# Altium PCB PCB.PcbDoc
Units mil, origin at the board's own origin, x right, y up, seen from the top; angles counter-clockwise.
Board outline 6000 x 4000 mil, 2 copper layers (Top Layer, Bottom Layer); 44 components, 79 nets, 189 pads, 16 vias.
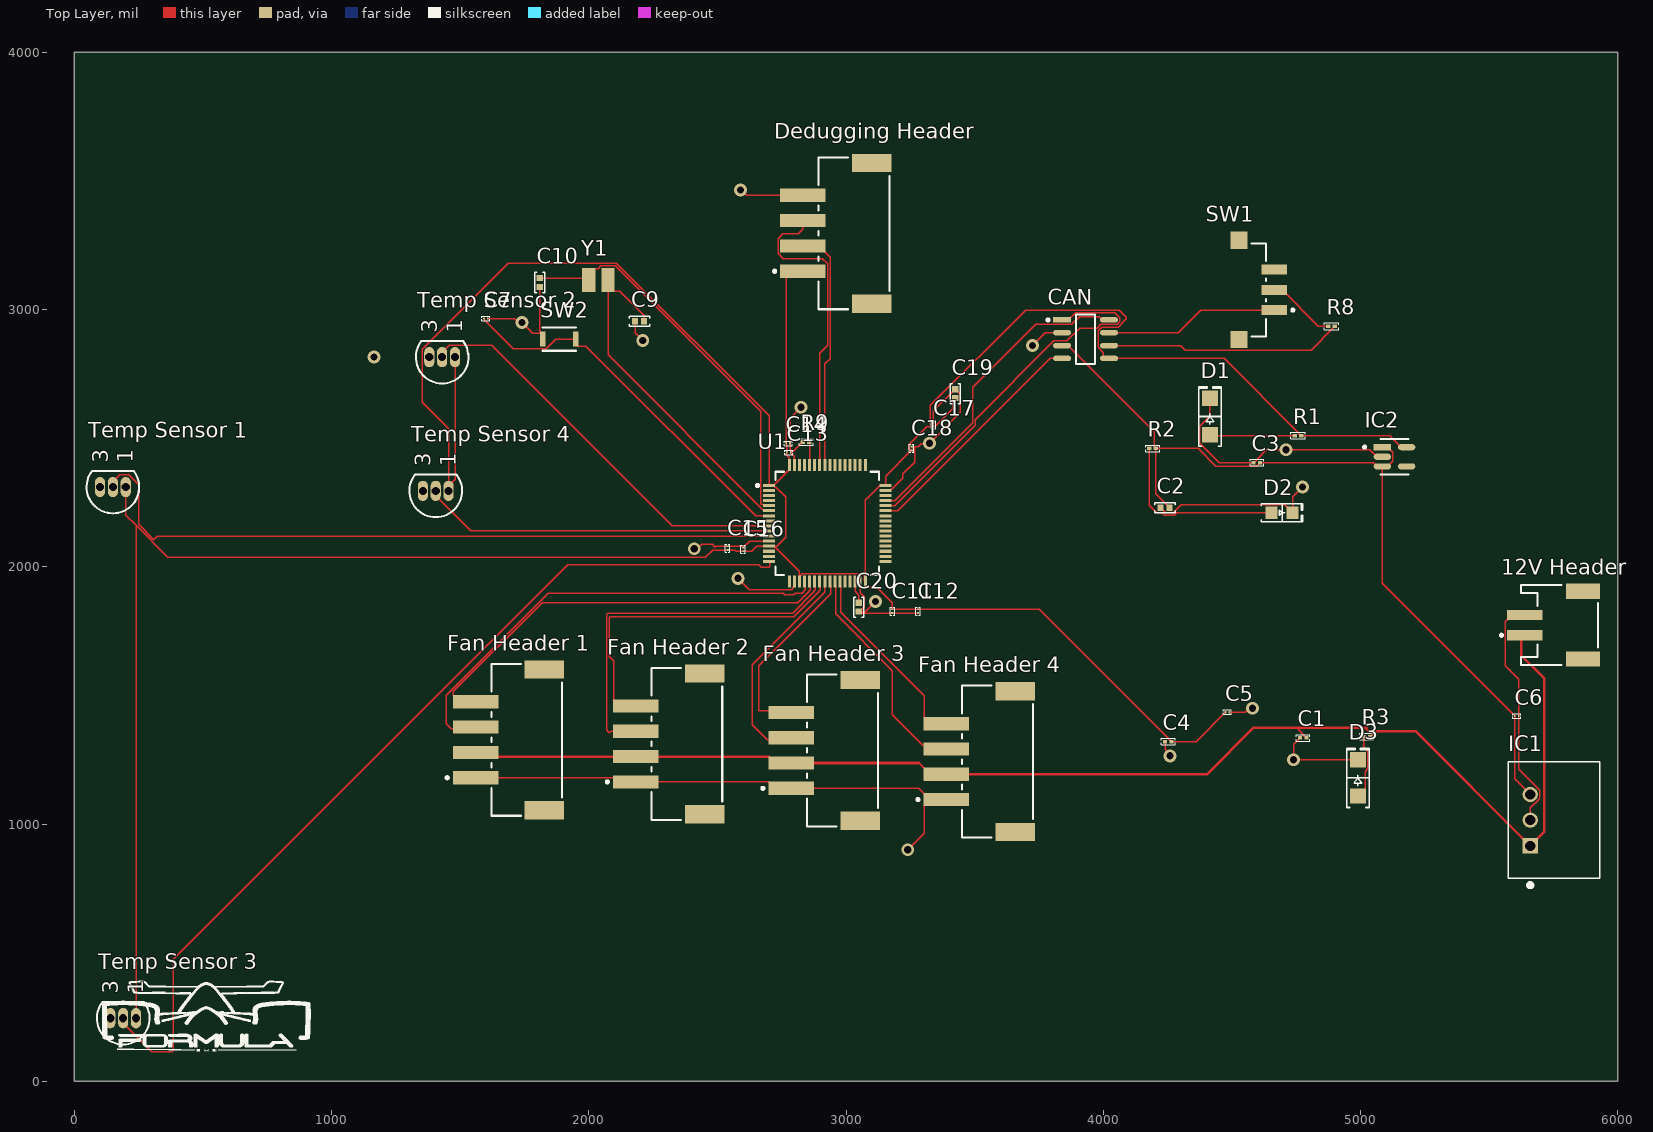
[diagram p0: Top Layer view]
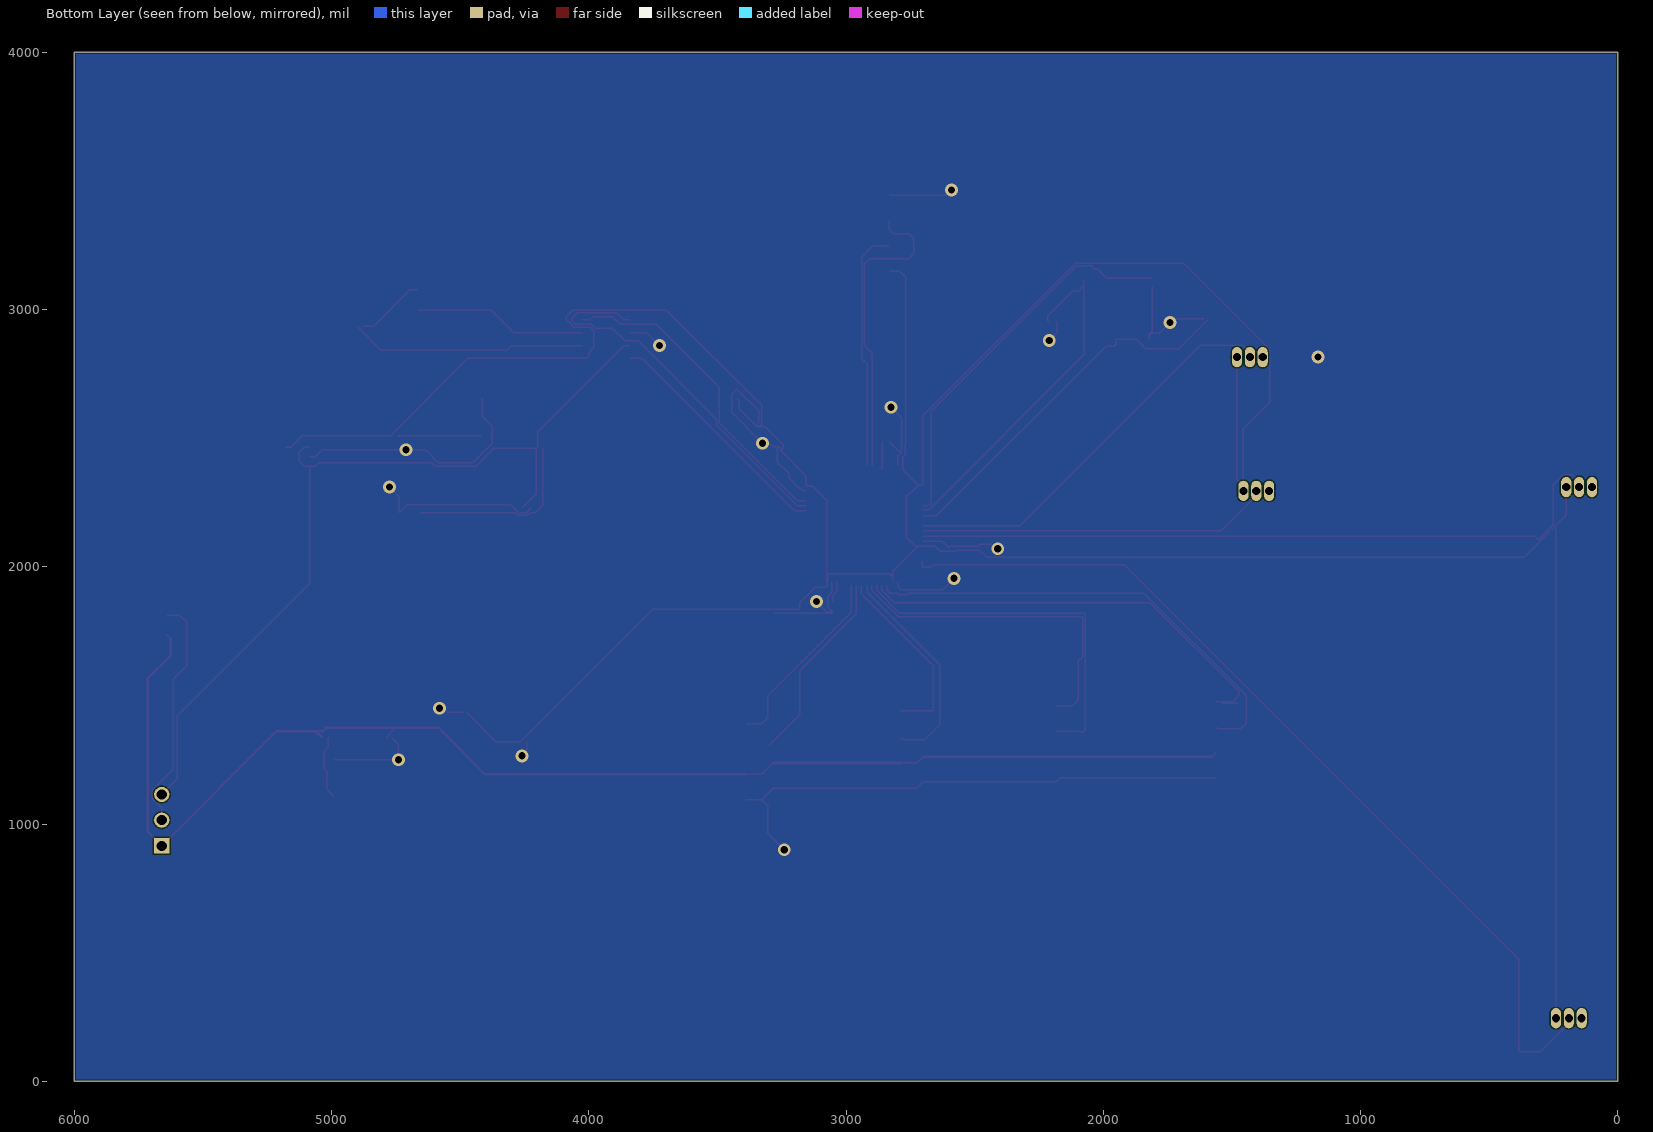
[diagram p1: Bottom Layer view, seen from below]
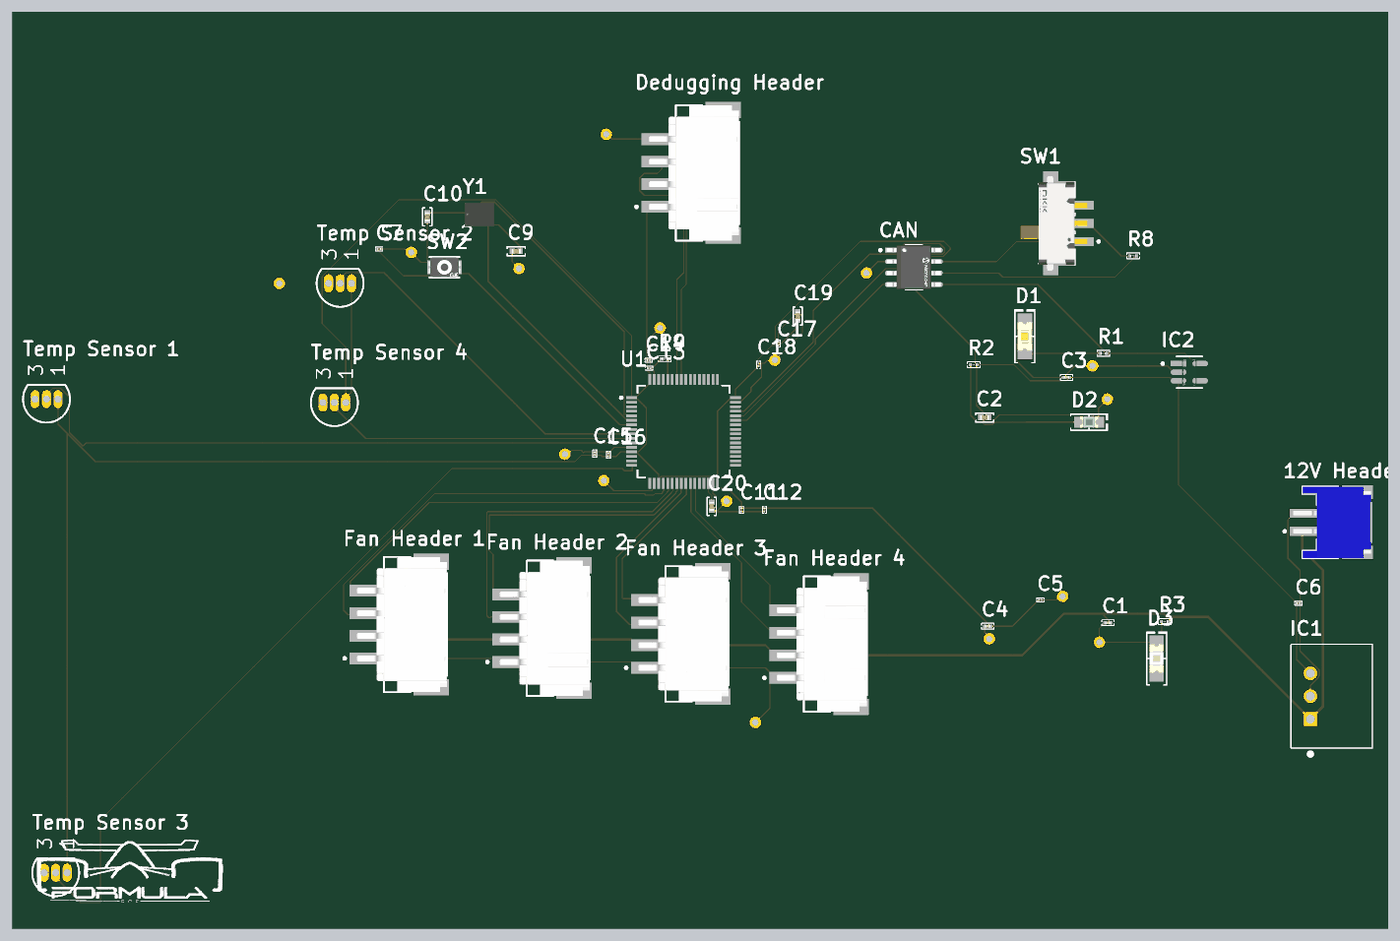
[diagram p2: 3D render of the assembled board from above, using the file's embedded part models]

## Layer stack, top to bottom
Top Solder: solder mask 0.4, Solder Resist, Dk 3.5
Top Layer: signal copper 1.4
Dielectric 1: dielectric 12.6, FR-4, Dk 4.8
Bottom Layer: signal copper 1.4
Bottom Solder: solder mask 0.4, Solder Resist, Dk 3.5

## Board outline
0,0 6000,0 6000,4000 0,4000

## Design rules (kind name [scope] priority, off if disabled: settings)
BoardOutlineClearance [All] p1: gap=7.87 ignorepadtopadclearanceinfootprint=FALSE
Clearance [All] p1: gap=5 ignorepadtopadclearanceinfootprint=FALSE except(9.84: Arc-Hole Track-Hole SMDPad-Hole THPad-Hole Via-Hole Fill-Hole Poly-Hole Region-Hole Text-Hole)
ComponentClearance [All] p1: gap=5 collisioncheckmode=3 verticalgap=5 showdistances=TRUE
DiffPairsRouting [All] p1: maxlimit=10 minlimit=5 mostfreqgap=5 toplayer_minwidth=5 toplayer_maxwidth=1000 toplayer_prefwidth=5 bottomlayer_minwidth=5 bottomlayer_maxwidth=1000 bottomlayer_prefwidth=5 maxuncoupledlength=500
Height [All] p1: minheight=0 maxheight=71497.94 prefheight=500
HoleSize [All] p1: absolutevalues=TRUE maxlimit=248.03 minlimit=11.81 maxpercent=80.000 minpercent=20.000
HoleToHoleClearance [All] p1: gap=9.84 allowstackedmicrovias=FALSE
MinimumAnnularRing [All] p1: minimumring=3
MinimumSolderMaskSliver [All] p1: minsoldermaskwidth=0
PlaneClearance [All] p1: clearance=5
PlaneConnect PlaneConnectPowerPads [InPadClass('PowerPads')] p1: planeconnectstyle=Direct reliefexpansion=20 reliefentries=4 reliefconductorwidth=10 reliefairgap=10
PlaneConnect [All] p2: pad.planeconnectstyle=Relief pad.reliefexpansion=11.81 pad.reliefentries=4 pad.reliefconductorwidth=5 pad.reliefairgap=5 via.planeconnectstyle=Direct via.reliefexpansion=11.81 via.reliefentries=4 via.reliefconductorwidth=5 via.reliefairgap=5
PolygonConnect PolygonConnectPowerPads [All vs (InPadClass('PowerPads'))] p1: connectstyle=Direct reliefconductorwidth=10 reliefentries=4 polygonreliefangle="90 Angle" airgapwidth=10
PolygonConnect [All] p2: thpad.connectstyle=Relief thpad.reliefconductorwidth=5 thpad.reliefentries=4 thpad.polygonreliefangle="90 Angle" thpad.airgapwidth=5 smdpad.connectstyle=Relief smdpad.reliefconductorwidth=5 smdpad.reliefentries=4 smdpad.polygonreliefangle="90 Angle" smdpad.airgapwidth=5 via.connectstyle=Direct via.reliefconductorwidth=5 via.reliefentries=4 via.polygonreliefangle="90 Angle" via.airgapwidth=5
RoutingVias [All] p1: holewidth=11.81 width=23.62 viastyle="Through Hole" minholewidth=11.81 minwidth=23.62 maxholewidth=23.62 maxwidth=259.84
SilkToSilkClearance [All] p1: silktosilkclearance=0
SilkToSolderMaskClearance [IsPad] p1: minsilkscreentomaskgap=5 clearancetoexposedcopper=TRUE
SolderMaskExpansion [All] p1: expansion=2.95 istentingtop=FALSE
Width [All] p1: maxlimit=1000 minlimit=5 preferedwidth=5 minimp=50.000000 maximp=50.000000 favimp=50.000000
20 further rules are at their usual default settings.

## Classes and differential pairs
component class STM: C7 C9 C10 C11 C12 C13 C14 C15 C16 C17 C18 C19 C20 R9 SW2 U1 Y1
component class Sensors: "Temp Sensor 1" "Temp Sensor 2" "Temp Sensor 3" "Temp Sensor 4"
component class Power: C1 C2 C3 C4 D1 D2 D3 IC1 IC2 R1 R2 R3
component class Headers: "12V Header" "Dedugging Header" "Fan Header 1" "Fan Header 2" "Fan Header 3" "Fan Header 4"
component class CANsetup: C5 C6 CAN R8 SW1

## Components (designator, comment, footprint, x,y, rotation, side; value= is the part's Value field where it differs from the comment)
"12V Header" "S2B-PH-SM4-TB(LF)(SN)" "JST- S2B-PH-SM4-TB(LF)(SN)-2_V" 5774.45,1773.11 r90 top
C1 "0.1 µF" "CAP 0201_0603" 4777.2,1335 r0 top
C2 "10 µF" "CAP 0402_1005" 4240,2230 r0 top
C3 "1 µF" "CAP 0201_0603" 4597.2,2405 r0 top
C4 "1 µF" "CAP 0201_0603" 4252.8,1320 r0 top
C5 "0.1 µF" "CAP 01005_0402" 4482.48,1435 r0 top
C6 "0.1 µF" "CAP 01005_0402" 5607.52,1420 r0 top
C7 "0.1 µF" "CAP 01005_0402" 1600,2965 r0 top
C9 "8 pF" "CAP 0402_1005" 2197.68,2955 r0 top
C10 "8 pF" "CAP 0402_1005" 1810,3105 r90 top
C11 "0.1 µF" "CAP 01005_0402" 3180,1827.52 r270 top
C12 "0.1 µF" "CAP 01005_0402" 3280,1827.48 r270 top
C13 "0.1 µF" "CAP 01005_0402" 2777.48,2445 r0 top
C14 "0.1 µF" "CAP 01005_0402" 2775,2480 r0 top
C15 "0.1 µF" "CAP 01005_0402" 2540,2072.52 r90 top
C16 "0.1 µF" "CAP 01005_0402" 2600,2067.52 r90 top
C17 "0.1 µF" "CAP 01005_0402" 3340,2552.48 r90 top
C18 "0.1 µF" "CAP 01005_0402" 3255,2460 r90 top
C19 "4.7 µF" "CAP 0402_1005" 3425,2672.68 r270 top
C20 "2.2 µF" "CAP 0402_1005" 3050,1842.68 r90 top
CAN "MCP2542FDT-E/SN" FP-C04-057-SN-IPC_C 3931.24,2885 r0 top
D1 "Yellow" "LED 1206_3216 YELLOW" 4415,2584.13 r90 top
D2 "Green" "LED 0805_2012 GREEN" 4695,2210 r0 top
D3 "Red" "LED 1206_3216 RED" 4990,1179.13 r90 top
"Dedugging Header" "S4B-XH-SM4-TB(LF)(SN)" FP-S4B-XH-SM4-TB_LF_SN-MFG 3031.1,3296.38 r90 top
"Fan Header 1" "S4B-XH-SM4-TB(LF)(SN)" FP-S4B-XH-SM4-TB_LF_SN-MFG 1758.82,1327.36 r90 top
"Fan Header 2" "S4B-XH-SM4-TB(LF)(SN)" FP-S4B-XH-SM4-TB_LF_SN-MFG 2381.1,1311.38 r90 top
"Fan Header 3" "S4B-XH-SM4-TB(LF)(SN)" FP-S4B-XH-SM4-TB_LF_SN-MFG 2986.1,1286.38 r90 top
"Fan Header 4" "S4B-XH-SM4-TB(LF)(SN)" FP-S4B-XH-SM4-TB_LF_SN-MFG 3588.82,1242.36 r90 top
IC1 "V7805-2000" CONV_V7805-2000 5752.52,1015 r90 top
IC2 "AP2112K-3.3TRG1" FP-SOT25-IPC_A 5132.27,2427.6 r0 top
R1 "220 mOhms" "RES 0201_0603" 4757.2,2510 r0 top
R2 "340 Ohms" "RES 0201_0603" 4192.2,2460 r0 top
R3 "1.8 kOhms" "RES 0201_0603" 5025,1340 r0 top
R8 "120 Ohms" "RES 0201_0603" 4887.2,2935 r0 top
R9 "10 kOhms" "RES 0201_0603" 2845,2485 r0 top
SW1 "SS312SAH4-R" FP-SS312SAH4-R-MFG 4553.78,3076.26 r0 top
SW2 "KXT331LHS" FP-KXT331LHS-MFG 1885,2885 r0 top
"Temp Sensor 1" "TMP36GT9Z" ADI-T-3 150,2310 r90 top
"Temp Sensor 2" "TMP36GT9Z" ADI-T-3 1430,2815 r90 top
"Temp Sensor 3" "TMP36GT9Z" ADI-T-3 190,245 r90 top
"Temp Sensor 4" "TMP36GT9Z" ADI-T-3 1405,2295 r90 top
U1 "STM32F446RET6" FP-LQFP64-5W-MFG 2927.36,2168.62 r0 top
Y1 "NX3225GD-8MHZ-STD-CRA-3" XTAL_NX3225GD-8MHZ-STD-CRA-3_NDK 2037.5,3115 r0 top

## Footprints (in the part's own frame and the unit in brackets; to place one, negate y for a bottom-side part, rotate by r counter-clockwise, add the part's x,y. Pads: shape width x height; smd on the part's side, far side on the other; paste and mask are expansions set on the pad)
ADI-T-3 [mm] "TO, Flat Index; 3 In-Line, Axial Leads; Body Dia. 5.1mm; Leads 0.48 x 0.48 mm (max)"
  oval 2x1 hole 0.8: 1(0,-1.27) 2(0,0) 3(0,1.27)
  silkscreen extent -2.6,-2.6 1.6,2.6, body extent -2.6,-2.61 1.6,2.61, height 5.33
"CAP 0201_0603" [mm] "Chip Capacitor, 2-Leads, Body 0.60x0.30mm, IPC Medium Density"
  rect 0.4x0.35 smd: 1(-0.31,0) 2(0.31,0)
  silkscreen extent -0.67,-0.33 0.67,0.33, body extent -0.3,-0.15 0.3,0.15, height 0.3
"CAP 0402_1005" [mm] "Chip Capacitor, 2-Leads, Body 1.02x0.51mm, IPC Medium Density"
  rect 0.6x0.64 smd: 1(-0.44,0) 2(0.44,0)
  silkscreen extent -1,-0.5 1,0.5, body extent -0.5,-0.26 0.5,0.26, height 0.52
"CAP 01005_0402" [mm] "Chip Capacitor, 2-Leads, Body 0.30x0.15mm, IPC Medium Density"
  rect 0.18x0.23 smd: 1(-0.19,0) 2(0.19,0)
  silkscreen extent -0.4,-0.22 0.4,0.22, body extent -0.2,-0.1 0.2,0.1, height 0.19
CONV_V7805-2000 [mm]
  rect 1.508x1.508 hole 1: 1(-2.54,2.35)
  round 1.508 hole 1: 2(0,2.35) 3(2.54,2.35)
  silkscreen extent -6.62,-4.5 5.75,4.5
FP-C04-057-SN-IPC_C [mil]
  rect 69.96x21.34 smd paste+0 mask+0: 1(-91.24,75)
  rrect100% 69.96x21.34 smd paste+0 mask+0: 2(-91.24,25) 3(-91.24,-25) 4(-91.24,-75) 5(91.24,-75) 6(91.24,-25) 7(91.24,25) 8(91.24,75)
  silkscreen extent -151,-96 37,96, body extent -130,-100 130,100, height 10
FP-KXT331LHS-MFG [mm]
  rect 0.55x1.5 smd paste+0 mask+0: 1(-1.625,0) 2(1.625,0)
  silkscreen extent -1.65,-1.15 1.65,1.15, body extent -2,-1.25 2,1.25, height 0.25
FP-LQFP64-5W-MFG [mm]
  rect 1.2x0.3 smd paste+0 mask+0: 1(-5.75,3.75) 2(-5.75,3.25) 3(-5.75,2.75) 4(-5.75,2.25) 5(-5.75,1.75) 6(-5.75,1.25) 7(-5.75,0.75) 8(-5.75,0.25) 9(-5.75,-0.25) 10(-5.75,-0.75) 11(-5.75,-1.25) 12(-5.75,-1.75) 13(-5.75,-2.25) 14(-5.75,-2.75) 15(-5.75,-3.25) 16(-5.75,-3.75) 33(5.75,-3.75) 34(5.75,-3.25) 35(5.75,-2.75) 36(5.75,-2.25) 37(5.75,-1.75) 38(5.75,-1.25) 39(5.75,-0.75) 40(5.75,-0.25) 41(5.75,0.25) 42(5.75,0.75) 43(5.75,1.25) 44(5.75,1.75) 45(5.75,2.25) 46(5.75,2.75) 47(5.75,3.25) 48(5.75,3.75)
  rect 0.3x1.2 smd paste+0 mask+0: 17(-3.75,-5.75) 18(-3.25,-5.75) 19(-2.75,-5.75) 20(-2.25,-5.75) 21(-1.75,-5.75) 22(-1.25,-5.75) 23(-0.75,-5.75) 24(-0.25,-5.75) 25(0.25,-5.75) 26(0.75,-5.75) 27(1.25,-5.75) 28(1.75,-5.75) 29(2.25,-5.75) 30(2.75,-5.75) 31(3.25,-5.75) 32(3.75,-5.75) 49(3.75,5.75) 50(3.25,5.75) 51(2.75,5.75) 52(2.25,5.75) 53(1.75,5.75) 54(1.25,5.75) 55(0.75,5.75) 56(0.25,5.75) 57(-0.25,5.75) 58(-0.75,5.75) 59(-1.25,5.75) 60(-1.75,5.75) 61(-2.25,5.75) 62(-2.75,5.75) 63(-3.25,5.75) 64(-3.75,5.75)
  silkscreen extent -7.02,-5.1 5.1,5.1
FP-S4B-XH-SM4-TB_LF_SN-MFG [mm]
  rect 1.3x4.5 smd paste+0 mask+0: 1(-3.75,5.05) 2(-1.25,5.05) 3(1.25,5.05) 4(3.75,5.05)
  rect 1.8x3.9 smd paste+0 mask+0: 5(-6.95,-1.75) 6(6.95,-1.75)
  silkscreen extent -7.5,-3.5 7.5,7.97, body extent -7.95,-3.8 7.95,7.4, height 0.25
FP-SOT25-IPC_A [mm]
  rect 1.707x0.616 smd paste+0 mask+0: 1(-1.201,0.95)
  rrect100% 1.707x0.616 smd paste+0 mask+0: 2(-1.201,0) 3(-1.201,-0.95) 4(1.201,-0.95) 5(1.201,0.95)
  silkscreen extent -3.08,-1.75 1.4,1.75, body extent -2.55,-2 2.55,2, height 0.25
FP-SS312SAH4-R-MFG [mm]
  rect 2.55x1 smd paste+0 mask+0: 1(2.825,-2) 2(2.825,0) 3(2.825,2)
  rect 1.7x1.7 smd paste+0 mask+0: 4(-0.65,4.9) 5(-0.65,-4.9)
  silkscreen extent 0.58,-4.6 4.78,4.6, body extent -4.1,-5.85 4.2,5.85, height 0.25
"JST- S2B-PH-SM4-TB(LF)(SN)-2_V" [mm] "SMD, 2-Leads, Body 7.9x7.6mm, Pitch 2mm"
  rect 1x3.5 smd: 1(-1,3.45) 2(1,3.45)
  rect 1.5x3.4 smd: MP1(-3.35,-2.3) MP2(3.35,-2.3)
  silkscreen extent -3.95,-3.8 3.95,5.87, body extent -3.95,-3.8 3.95,4.8, height 5.6
"LED 0805_2012 GREEN" [mm] "Chip Diode, 2-Leads, Body 2.00x1.25mm, IPC Medium Density"
  rect 1.2x1.2 smd: 1(-1.05,0) 2(1.05,0)
  silkscreen extent -2.03,-0.9 2.03,0.9, body extent -1,-0.62 1,0.63, height 0.9
"LED 1206_3216 RED" [mm] "Chip Diode, 2-Leads, Body 3.13x1.55mm, IPC Medium Density"
  rect 1.5x1.6 smd: 1(-1.8,0) 2(1.8,0)
  silkscreen extent -2.92,-1.1 2.92,1.1, body extent -1.6,-0.8 1.6,0.8, height 0.9
"LED 1206_3216 YELLOW" [mm] "Chip Diode, 2-Leads, Body 3.13x1.55mm, IPC Medium Density"
  rect 1.5x1.6 smd: 1(-1.8,0) 2(1.8,0)
  silkscreen extent -2.92,-1.1 2.92,1.1, body extent -1.6,-0.8 1.6,0.8, height 0.9
"RES 0201_0603" [mm] "Chip Resistor, 2-Leads, Body 0.60x0.30mm, IPC Medium Density"
  rect 0.44x0.35 smd: 1(-0.325,0) 2(0.325,0)
  silkscreen extent -0.7,-0.33 0.7,0.33, body extent -0.3,-0.15 0.3,0.15, height 0.21
XTAL_NX3225GD-8MHZ-STD-CRA-3_NDK [mil]
  rect 51x94 smd paste+0 mask+0: 1(-37.5,0) 2(37.5,0)
  body extent -65,-51 65,51, height 39

## Part data
"12V Header": library part CMP-1755-00001-1, "Male Header, Pitch 2 mm, 1 x 2 Position, Height 5.5 mm, -25 to 85 degC, RoHS, Tape and Reel", Colour=Black, Current Rating="3 A", Max Operating Temperature=105degC, Min Operating Temperature=-65degC, Package Quantity=100, ComponentLink1Description="Manufacturer URL", ComponentLink1URL=http://www.jst.com/home2.html, ComponentLink2Description=Datasheet, ComponentLink2URL=http://www.jst-mfg.com/product/pdf/eng/ePH.pdf, Contact Finish=Lead, Contact material=Bronze, Contact Plating=Tin, DatasheetVersion=Dec-12, Height="8.13 mm", Lead Pitch="0.1 inch", Length="101.19 mm", Mount="Through Hole", PackageDescription="Male Header, Pitch 2 mm, 1 x 2 Position, Height 5.5 mm", PackageReference=S2B-PH-SM4-TB(LF)(SN)-2, Packaging=Bulk, Pins=40, Radiation Hardening=No, RoHSCompliant=True, Width="2.34 mm"
C1: library part EMK063BJ104MP-F, "CAP CER 0.1UF 16V X5R 0201", Device Package="0201 (0603 Metric)", Manufacturer="Taiyo Yuden", Operating temperature="-55°C ~ 85°C", Supplier Part Number 1=587-6302-1-ND, Temperature Coefficient=X5R, Tolerance=±20%, Voltage - Rated=16V, Applications="SMPS Filtering", Capacitance="0.1 µF", ComponentLink1Description=Datasheet, ComponentLink1URL="https://ds.yuden.co.jp/TYCOMPAS/ut/detail?pn=EMK063BJ104MP-F &u=M", ComponentLink2Description="DigiKey Link", ComponentLink2URL=https://www.digikey.com/en/products/detail/taiyo-yuden/EMK063BJ104MP-F/7403527, LastUpdated="2024-01-11 8:00:55 PM", Lifecycle Status=Active, Minimum Order=1, Mounting Type="Surface Mount, MLCC", Package / Case="0201 (0603 Metric)", Packaging=CutTape, Part Number=EMK063BJ104MP-F, Part Status=Active, PartId=79, Price=0.01, Series=M, Size / Dimension="0.024\" L x 0.012\" W (0.60mm x 0.30mm)", Supplier 1=DigiKey, Thickness (Max)="0.015\" (0.39mm)"
C2: library part CL05A106MP8NUB8, "CAP CER 10UF 10V X5R 0402", Device Package="0402 (1005 Metric)", Manufacturer="Samsung Electro-Mechanics", Operating temperature="-55°C ~ 85°C", Supplier Part Number 1=1276-6830-1-ND, Temperature Coefficient=X5R, Tolerance=±20%, Voltage - Rated=10V, Applications="Acoustic Noise Reduction", Capacitance="10 µF", ComponentLink1Description=Datasheet, ComponentLink1URL=http://www.samsungsem.com/kr/support/product-search/mlcc/CL05A106MP8NUB8.jsp, ComponentLink2Description="DigiKey Link", ComponentLink2URL=https://www.digikey.com/en/products/detail/samsung-electro-mechanics/CL05A106MP8NUB8/5961314, LastUpdated="2024-01-11 8:04:27 PM", Lifecycle Status=Active, Minimum Order=1, Mounting Type="Surface Mount, MLCC", Package / Case="0402 (1005 Metric)", Packaging=TapeAndReel, Part Number=CL05A106MP8NUB8, Part Status=Active, PartId=1758, Price=0.06, Series=CL, Size / Dimension="0.039\" L x 0.020\" W (1.00mm x 0.50mm)", Supplier 1=DigiKey, Thickness (Max)="0.035\" (0.90mm)"
C3 C4: library part CL03A105MQ3CSNC, "CAP CER 1UF 6.3V X5R 0201", Device Package="0201 (0603 Metric)", Manufacturer="Samsung Electro-Mechanics", Operating temperature="-55°C ~ 85°C", Supplier Part Number 1=1276-1325-1-ND, Temperature Coefficient=X5R, Tolerance=±20%, Voltage - Rated=6.3V, Applications="General Purpose", Capacitance="1 µF", ComponentLink1Description=Datasheet, ComponentLink1URL=http://www.samsungsem.com/kr/support/product-search/mlcc/CL03A105MQ3CSNC.jsp, ComponentLink2Description="DigiKey Link", ComponentLink2URL=https://www.digikey.com/en/products/detail/samsung-electro-mechanics/CL03A105MQ3CSNC/3886983, LastUpdated="2024-01-11 8:00:55 PM", Lifecycle Status=Active, Minimum Order=1, Mounting Type="Surface Mount, MLCC", Package / Case="0201 (0603 Metric)", Packaging=TapeAndReel, Part Number=CL03A105MQ3CSNC, Part Status=Active, PartId=93, Price=0.01, Series=CL, Size / Dimension="0.024\" L x 0.012\" W (0.60mm x 0.30mm)", Supplier 1=DigiKey, Thickness (Max)="0.013\" (0.33mm)"
C5 C6 C7 C11 C12 C13 C14 C15 C16 C17 C18: library part CL02A104KQ2NNNC, "CAP CER 0.1UF 6.3V X5R 01005", Device Package="01005 (0402 Metric)", Manufacturer="Samsung Electro-Mechanics", Operating temperature="-55°C ~ 85°C", Supplier Part Number 1=1276-1209-1-ND, Temperature Coefficient=X5R, Tolerance=±10%, Voltage - Rated=6.3V, Applications="General Purpose", Capacitance="0.1 µF", ComponentLink1Description=Datasheet, ComponentLink1URL=http://www.samsungsem.com/kr/support/product-search/mlcc/CL02A104KQ2NNNC.jsp, ComponentLink2Description="DigiKey Link", ComponentLink2URL=https://www.digikey.com/en/products/detail/samsung-electro-mechanics/CL02A104KQ2NNNC/3886867, LastUpdated="2023-11-30 9:46:05 PM", Lifecycle Status=Active, Minimum Order=1, Mounting Type="Surface Mount, MLCC", Package / Case="01005 (0402 Metric)", Packaging=TapeAndReel, Part Number=CL02A104KQ2NNNC, Part Status=Active, Price=0.02, Series=CL, Size / Dimension="0.016\" L x 0.008\" W (0.40mm x 0.20mm)", Supplier 1=DigiKey, Thickness (Max)="0.009\" (0.22mm)"
C9 C10: library part GCM1555C1H8R0FA16D, "CAP CER 8PF 50V C0G/NP0 0402", Device Package="0402 (1005 Metric)", Manufacturer="Murata Electronics", Operating temperature="-55°C ~ 125°C", Ratings=AEC-Q200, Supplier Part Number 1=490-GCM1555C1H8R0FA16DCT-ND, Temperature Coefficient="C0G, NP0", Tolerance=±1%, Voltage - Rated=50V, Applications=Automotive, Capacitance="8 pF", ComponentLink1Description=Datasheet, ComponentLink1URL=https://search.murata.co.jp/Ceramy/image/img/A01X/G101/ENG/GCM1555C1H8R0FA16-01.pdf, ComponentLink2Description="DigiKey Link", ComponentLink2URL=https://www.digikey.com/en/products/detail/murata-electronics/GCM1555C1H8R0FA16D/11618789, LastUpdated="2024-01-11 8:04:05 PM", Lifecycle Status=Active, Minimum Order=1, Mounting Type="Surface Mount, MLCC", Package / Case="0402 (1005 Metric)", Packaging=TapeAndReel, Part Number=GCM1555C1H8R0FA16D, Part Status=Active, PartId=34002, Price=0.01, Series=GCM, Size / Dimension="0.039\" L x 0.020\" W (1.00mm x 0.50mm)", Supplier 1=DigiKey, Thickness (Max)="0.022\" (0.55mm)"
C19: library part CL05A475MO5NUNC, "CAP CER 4.7UF 16V X5R 0402", Device Package="0402 (1005 Metric)", Manufacturer="Samsung Electro-Mechanics", Operating temperature="-55°C ~ 85°C", Supplier Part Number 1=1276-6836-1-ND, Temperature Coefficient=X5R, Tolerance=±20%, Voltage - Rated=16V, Applications="General Purpose", Capacitance="4.7 µF", ComponentLink1Description=Datasheet, ComponentLink1URL=http://www.samsungsem.com/kr/support/product-search/mlcc/__icsFiles/afieldfile/2019/05/29/Data%20sheet_CL05A475MO5NUNC.pdf, ComponentLink2Description="DigiKey Link", ComponentLink2URL=https://www.digikey.com/en/products/detail/samsung-electro-mechanics/CL05A475MO5NUNC/5961320, LastUpdated="2024-01-11 8:04:27 PM", Lifecycle Status=Active, Minimum Order=1, Mounting Type="Surface Mount, MLCC", Package / Case="0402 (1005 Metric)", Packaging=TapeAndReel, Part Number=CL05A475MO5NUNC, Part Status=Active, PartId=1760, Price=0.08, Series=CL, Size / Dimension="0.039\" L x 0.020\" W (1.00mm x 0.50mm)", Supplier 1=DigiKey, Thickness (Max)="0.028\" (0.70mm)"
C20: library part CL05A225KO5NQNC, "CAP CER 2.2UF 16V X5R 0402", Device Package="0402 (1005 Metric)", Manufacturer="Samsung Electro-Mechanics", Operating temperature="-55°C ~ 85°C", Supplier Part Number 1=1276-1461-1-ND, Temperature Coefficient=X5R, Tolerance=±10%, Voltage - Rated=16V, Applications="General Purpose", Capacitance="2.2 µF", ComponentLink1Description=Datasheet, ComponentLink1URL=http://www.samsungsem.com/kr/support/product-search/mlcc/CL05A225KO5NQNC.jsp, ComponentLink2Description="DigiKey Link", ComponentLink2URL=https://www.digikey.com/en/products/detail/samsung-electro-mechanics/CL05A225KO5NQNC/3887119, LastUpdated="2024-01-11 8:04:27 PM", Lifecycle Status=Active, Minimum Order=1, Mounting Type="Surface Mount, MLCC", Package / Case="0402 (1005 Metric)", Packaging=TapeAndReel, Part Number=CL05A225KO5NQNC, Part Status=Active, PartId=1761, Price=0.03, Series=CL, Size / Dimension="0.039\" L x 0.020\" W (1.00mm x 0.50mm)", Supplier 1=DigiKey, Thickness (Max)="0.022\" (0.55mm)"
CAN: library part CMP-06279-000006-1, "IC TRANSCEIVER 1/1 8SOIC", Case/Package=SOIC, Max Operating Temperature=125°C, Min Operating Temperature=-40°C, Data Rate=8Mbps, Mount="Surface Mount", Packaging=Rail/Tube, Receiver Hysteresis=200mV
D1: library part 25-21UYC/S530-A2/TR8, "LED YELLOW CLEAR 2SMD", Current - Test=20mA, Device Package="1206 (3216 Metric)", Lens Color=Colorless, Manufacturer="Everlight Electronics Co Ltd", Millicandela Rating=45mcd, Supplier Device Package=2-SMD, Supplier Part Number 1=1080-1595-1-ND, Voltage - Forward (Vf) (Typ)=2V, Color=Yellow, ComponentLink1Description=Datasheet, ComponentLink1URL=//media.digikey.com/pdf/Data%20Sheets/Everlight%20PDFs/25-21UYC-S530-A2-TR8_V6_11-12-18.pdf, ComponentLink2Description="DigiKey Link", ComponentLink2URL=https://www.digikey.com/en/products/detail/everlight-electronics-co-ltd/25-21UYC-S530-A2-TR8/8535289, Configuration=Standard, Height (Max)=1.20mm, LastUpdated="2023-08-19 8:22:38 PM", Lens Size="1.10mm Dia", Lens Style="Round with Domed Top", Lens Transparency=Clear, Lifecycle Status=Active, Minimum Order=1, Mounting Type="Surface Mount", Package / Case="1206 (3216 Metric)", Packaging=TapeAndReel, Part Number=25-21UYC/S530-A2/TR8, Part Status=Active, PartId=2, Price=0.08, Series=-, Size / Dimension="3.20mm L x 1.60mm W", Supplier 1=DigiKey, Viewing Angle=60°, Wavelength - Dominant=589nm, Wavelength - Peak=591nm
D2: library part QTLP630C4TR, "LED GREEN CLEAR 0805 SMD", Current - Test=20mA, Device Package="0805 (2012 Metric)", Lens Color=Colorless, Manufacturer="Everlight Electronics Co Ltd", Millicandela Rating=10mcd, Supplier Device Package=0805, Supplier Part Number 1=1080-1411-1-ND, Voltage - Forward (Vf) (Typ)=2.1V, Color=Green, ComponentLink1Description=Datasheet, ComponentLink1URL=//media.digikey.com/PDF/Data%20Sheets/Everlight%20PDFs/QTLP630-2.pdf, ComponentLink2Description="DigiKey Link", ComponentLink2URL=https://www.digikey.com/en/products/detail/everlight-electronics-co-ltd/QTLP630C4TR/2675902, Configuration=Standard, Height (Max)=1.20mm, LastUpdated="2023-08-19 8:21:40 PM", Lens Size="1.40mm x 1.25mm", Lens Style="Rectangle with Flat Top", Lens Transparency=Clear, Lifecycle Status=Active, Minimum Order=1, Mounting Type="Surface Mount", Package / Case="0805 (2012 Metric)", Packaging=TapeAndReel, Part Number=QTLP630C4TR, Part Status=Active, PartId=240, Price=0.05, Series=-, Size / Dimension="2.00mm L x 1.25mm W", Supplier 1=DigiKey, Viewing Angle=140°, Wavelength - Dominant=570nm, Wavelength - Peak=565nm
D3: library part XZMDK55W-A2RT, "LED RED CLEAR 2SMD", Current - Test=20mA, Device Package="1206 (3216 Metric)", Lens Color=Colorless, Manufacturer=SunLED, Millicandela Rating=228mcd, Supplier Device Package=2-SMD, Supplier Part Number 1=1497-1289-1-ND, Voltage - Forward (Vf) (Typ)=1.95V, Color=Red, ComponentLink1Description=Datasheet, ComponentLink1URL=https://www.sunledusa.com/products/spec/XZMDK55W-A2RT.pdf, ComponentLink2Description="DigiKey Link", ComponentLink2URL=https://www.digikey.com/en/products/detail/sunled/XZMDK55W-A2RT/5775264, Configuration=Standard, Height (Max)=1.20mm, LastUpdated="2023-08-19 8:21:50 PM", Lens Size="1.10mm Dia", Lens Style="Round with Flat Top", Lens Transparency=Clear, Lifecycle Status=Active, Minimum Order=1, Mounting Type="Surface Mount", Package / Case="1206 (3216 Metric)", Packaging=TapeAndReel, Part Number=XZMDK55W-A2RT, Part Status=Active, PartId=183, Price=0.06, Series=-, Size / Dimension="3.20mm L x 1.60mm W", Supplier 1=DigiKey, Viewing Angle=70°, Wavelength - Dominant=630nm, Wavelength - Peak=645nm
"Dedugging Header" "Fan Header 1" "Fan Header 2" "Fan Header 3" "Fan Header 4": library part CMP-17439-000072-1, "CONN HEADER SMD R/A 4POS 2.5MM", Color=Natural, Contact Resistance=20mR, Housing Color=Beige, Max Current Rating=3A, Max Operating Temperature=85°C, Max Voltage Rating (AC)=250V, Min Operating Temperature=-25°C, Package Quantity=1, Connector Type="Male Pin", Contact material="Copper Alloy", Contact Plating=Tin, Contact Type="Male Pin", Depth=10mm, Gender=Male, Housing Material=Polyamide, Lead Free="Lead Free", Length=15mm, Mount="Surface Mount", Number of Contacts=4, Number of Positions=4, Number of Rows=1, Orientation="Right Angle", Packaging="Tape and Reel", Pitch=0.098inch, REACH SVHC="No SVHC", Series=XH, Termination=Solder
IC1: "2 A Output Current, 4.75~18 Vdc Input, 3 Pin SIP, Non-Isolated, Dc-Dc Converter", Package="SIP-3 CUI", CUI_purchase_URL=https://www.cui.com/product/dc-dc-converters/non-isolated/v78-2000-series?utm_source=snapeda.com&utm_medium=referral&utm_campaign=snapedaBOM, Digi-Key_Part_Number=102-2188-ND, DigiKey-Purchase-URL=https://snapeda.com/shop?store=DigiKey&id=2773183, MF="CUI Inc.", MP=V7805-2000, SnapEDA_Link=https://www.snapeda.com/parts/V7805-2000/CUI/view-part/2773183/?ref=snap
IC2: library part CMP-12756-000035-1, "IC REG LINEAR 3.3V 600MA SOT25", Case/Package=SOT-23-5, Dropout Voltage=250mV, Max Input Voltage=6V, Max Operating Temperature=85°C, Max Output Current=600mA, Min Input Voltage=2.5V, Min Operating Temperature=-40°C, Output Voltage=3.3V, Package Quantity=1, Quiescent Current=55uA, Accuracy=1.5%, Height=1.3mm, Lead Free="Lead Free", Length=3.1mm, Mount="Surface Mount", Number of Outputs=1, Number of Pins=5, Number of Regulators=1, Output Current=600mA, Output Type=Fixed, Packaging="Tape and Reel", Polarity=Positive, Width=1.7mm
R1: library part UCR006YVPFLR220, "RES 0.22 OHM 1% 1/10W 0201", Device Package="0201 (0603 Metric)", Manufacturer="Rohm Semiconductor", Operating temperature="-55°C ~ 155°C", Power (Watts)="0.1W, 1/10W", Supplier Device Package=0201, Supplier Part Number 1=RHM1702-1-ND, Temperature Coefficient="0/ +300ppm/°C", Tolerance=±1%, ComponentLink1Description=Datasheet, ComponentLink1URL=https://www.rohm.com/datasheet/UCR10EVHJS/ucr-e, ComponentLink2Description="DigiKey Link", ComponentLink2URL=https://www.digikey.com/en/products/detail/rohm-semiconductor/UCR006YVPFLR220/5247873, Composition="Thick Film", Features="Current Sense", Height - Seated (Max)="0.011\" (0.28mm)", LastUpdated="2023-08-19 7:17:26 PM", Lifecycle Status=Active, Minimum Order=1, Number of Terminations=2, Package / Case="0201 (0603 Metric)", Packaging=TapeAndReel, Part Number=UCR006YVPFLR220, Part Status=Active, PartId=108, Price=0.12, Resistance="220 mOhms", Series=UCR, Size / Dimension="0.024\" L x 0.013\" W (0.60mm x 0.33mm)", Supplier 1=DigiKey
R2: library part AC0201FR-07340RL, "RES SMD 340 OHM 1% 1/20W 0201", Device Package="0201 (0603 Metric)", Manufacturer=Yageo, Operating temperature="-55°C ~ 155°C", Power (Watts)="0.05W, 1/20W", Ratings=AEC-Q200, Supplier Device Package=0201, Supplier Part Number 1=YAG5199CT-ND, Temperature Coefficient=±200ppm/°C, Tolerance=±1%, ComponentLink1Description=Datasheet, ComponentLink1URL=https://www.yageo.com/upload/media/product/productsearch/datasheet/rchip/PYu-AC_51_RoHS_L_7.pdf, ComponentLink2Description="DigiKey Link", ComponentLink2URL=https://www.digikey.com/en/products/detail/yageo/AC0201FR-07340RL/5894560, Composition="Thick Film", Features="Automotive AEC-Q200, Moisture Resistant", Height - Seated (Max)="0.010\" (0.26mm)", LastUpdated="2023-08-19 7:17:26 PM", Lifecycle Status=Active, Minimum Order=1, Number of Terminations=2, Package / Case="0201 (0603 Metric)", Packaging=TapeAndReel, Part Number=AC0201FR-07340RL, Part Status=Active, PartId=145, Price=0.01, Resistance="340 Ohms", Series=AC, Size / Dimension="0.024\" L x 0.012\" W (0.60mm x 0.30mm)", Supplier 1=DigiKey
R3: library part CRCW02011K80JNED, "RES SMD 1.8K OHM 5% 1/20W 0201", Device Package="0201 (0603 Metric)", Manufacturer="Vishay Dale", Operating temperature="-55°C ~ 155°C", Power (Watts)="0.05W, 1/20W", Supplier Device Package=0201, Supplier Part Number 1=541-CRCW02011K80JNEDCT-ND, Temperature Coefficient=±200ppm/°C, Tolerance=±5%, ComponentLink1Description=Datasheet, ComponentLink1URL=http://www.vishay.com/docs/20052/crcw0201e3.pdf, ComponentLink2Description="DigiKey Link", ComponentLink2URL=https://www.digikey.com/en/products/detail/vishay-dale/CRCW02011K80JNED/1199542, Composition="Thick Film", Height - Seated (Max)="0.010\" (0.26mm)", LastUpdated="2023-08-19 7:17:24 PM", Lifecycle Status=Active, Minimum Order=1, Number of Terminations=2, Package / Case="0201 (0603 Metric)", Packaging=CutTape, Part Number=CRCW02011K80JNED, Part Status=Active, PartId=479, Price=0.01, Resistance="1.8 kOhms", Series=CRCW, Size / Dimension="0.024\" L x 0.012\" W (0.60mm x 0.30mm)", Supplier 1=DigiKey
R8: library part RMCF0201JT120R, "RES 120 OHM 5% 1/20W 0201", Device Package="0201 (0603 Metric)", Manufacturer="Stackpole Electronics Inc", Operating temperature="-55°C ~ 155°C", Power (Watts)="0.05W, 1/20W", Ratings=AEC-Q200, Supplier Device Package=0201, Supplier Part Number 1=738-RMCF0201JT120RCT-ND, Temperature Coefficient=±200ppm/°C, Tolerance=±5%, ComponentLink1Description=Datasheet, ComponentLink1URL=https://www.seielect.com/catalog/sei-rmcf_rmcp.pdf, ComponentLink2Description="DigiKey Link", ComponentLink2URL=https://www.digikey.com/en/products/detail/stackpole-electronics-inc/RMCF0201JT120R/5966040, Composition="Thick Film", Height - Seated (Max)="0.010\" (0.26mm)", LastUpdated="2023-11-30 8:20:29 PM", Lifecycle Status=Active, Minimum Order=1, Number of Terminations=2, Package / Case="0201 (0603 Metric)", Packaging=CutTape, Part Number=RMCF0201JT120R, Part Status=Active, PartId=197, Price=0.01, Resistance="120 Ohms", Series=RMCF, Size / Dimension="0.024\" L x 0.012\" W (0.60mm x 0.30mm)", Supplier 1=DigiKey
R9: library part CRCW020110K0FKED, "RES SMD 10K OHM 1% 1/20W 0201", Device Package="0201 (0603 Metric)", Manufacturer="Vishay Dale", Operating temperature="-55°C ~ 155°C", Power (Watts)="0.05W, 1/20W", Supplier Device Package=0201, Supplier Part Number 1=541-10.0KAABCT-ND, Temperature Coefficient=±100ppm/°C, Tolerance=±1%, ComponentLink1Description=Datasheet, ComponentLink1URL=http://www.vishay.com/docs/20052/crcw0201e3.pdf, ComponentLink2Description="DigiKey Link", ComponentLink2URL=https://www.digikey.com/en/products/detail/vishay-dale/CRCW020110K0FKED/1967989, Composition="Thick Film", Height - Seated (Max)="0.010\" (0.26mm)", LastUpdated="2024-01-11 8:21:19 PM", Lifecycle Status=Active, Minimum Order=1, Number of Terminations=2, Package / Case="0201 (0603 Metric)", Packaging=TapeAndReel, Part Number=CRCW020110K0FKED, Part Status=Active, PartId=29, Price=0.02, Resistance="10 kOhms", Series=CRCW, Size / Dimension="0.024\" L x 0.012\" W (0.60mm x 0.30mm)", Supplier 1=DigiKey
SW1: library part CMP-31746-000001-1, "SWITCH SLIDE SPDT 0.4VA 28V", Case/Package=SMD/SMT, Max Current Rating=100mA, Max Operating Temperature=85°C, Max Voltage Rating (AC)=28V, Min Operating Temperature=-25°C, Package Quantity=1, Actuator Length=2mm, Actuator Material=Polyphenylene, Actuator Type=Standard, Contact material=Bronze, Contact Plating=Gold, Contact Style=Shorting, Depth=7.45mm, Electrical Life=10000Cycles, Housing Material=Bronze, Lead Free="Lead Free", Length=10.5mm, Max Voltage Rating (DC)=28V, Mechanical Life=10000Cycles, Mount="Surface Mount", Orientation="Right Angle", Packaging="Tape and Reel", REACH SVHC="No SVHC", RoHS Compliant=Yes, Series=SS3, Switch Function=On-On, Switch Travel=2mm, Termination="Gull Wing", Throw Configuration=SPDT, Voltage Rating (AC)=28V, Voltage Rating (DC)=28V
SW2: library part CMP-10040-000029-1, "SWITCH TACTILE SPST-NO 0.02A 15V", Current Rating=5A, Flammability Rating="UL94 V-0", Insulation Color=Black, Max Operating Temperature=85°C, Min Operating Temperature=-40°C, Operating Force=240gf, Actuator Type=Standard, Connector Type=USB, Contact Plating=Gold, Gender=Receptacle, Illumination Type=Non-Illuminated, Mechanical Life=500000Cycles, Mount="Surface Mount", Number of Contacts=24, Number of Ports=1, Packaging="Tape and Reel", Switch Function=Off-Mom, Switch Travel=0.13mm, Termination=Solder, Throw Configuration=SPST
"Temp Sensor 1" "Temp Sensor 2" "Temp Sensor 3" "Temp Sensor 4": library part CMP-0887-00067-1, "Low Voltage Temperature Sensor, 2.7 to 5.5 V Supply, Industrial, 3-pin TO92 (T-3), Tray", Manufacturer="Analog Devices", Supply Voltage Range="2.7 to 5.5 V", Code_JEDEC=TO-226-AA, ComponentLink1Description="Manufacturer URL", ComponentLink1URL=http://www.analog.com/en/index.html, ComponentLink2Description=Datasheet, ComponentLink2URL=http://www.analog.com/static/imported-files/data_sheets/TMP35_36_37.pdf, ComponentLink3Description="Package Specification", ComponentLink3URL=http://www.analog.com/static/imported-files/packages/PKG_PDF/TO-92(T)/T_3.pdf, ComponentLink4Description="Product URL", ComponentLink4URL=http://www.analog.com/en/mems-sensors/digital-temperature-sensors/tmp36/products/product.html, DatasheetVersion="Rev. F", Mounting Technology="Through Hole", PackageDescription="3-Pin Plastic Header-Style Package, 1.27 mm Pitch", PackageReference=T-3, PackageVersion="042208-A, 04/2008", Packing=Tray, PartNumber=TMP36GT9Z
U1: library part CMP-12105-000007-1, "IC MCU 32BIT 512KB FLASH 64LQFP", Ambient Temperature Range High=+85°C, Ambient Temperature Range Low=-40°C, Frequency=180MHz, Manufacturer=ST, Max Junction Temp=+105°C, Max Supply Voltage=3.6V, Min Supply Voltage=1.7V, Package=LQFP64-5W, Temperature="-40°C to +105°C", Automotive=No, Category=IC, ComponentLink2Description=Datasheet, ComponentLink2URL=https://www.st.com/en/microcontrollers-microprocessors/stm32f446re.html, Core Architecture="ARM Cortex-M4", Data Bus Width=32bits, Device Class L1="Integrated Circuits (ICs)", Device Class L2="Embedded Processors and Controllers", Device Class L3=Microcontrollers, Digikey Description="IC MCU 32BIT 512KB FLASH 64LQFP", Height=1.6mm, Interface=I2C,SPI,UART,USART,CAN,USB,LIN,IrDA,I2S,Other, Ipc Land Pattern Name=QFP50P1200X1200X160-64, Lead Free=Yes, Manufacturer Part Number=STM32F446RET6, Memory Size=512KBytes, Memory Type=FLASH, Mouser Description="ARM Microcontrollers - MCU High-performance and DSP with FP, ARM Cortex-M4 MCU with 512 Kbytes Flash, 180 MHz CPU, Art Accelerator, SDRAM", Number Of A/D Converters=3, Number Of Adc Channels=16, Number Of Cores=1, Number Of I2C Channels=4, Number Of I/Os=50, Number Of Pwm Channels=32, Number Of Spi Channels=4, Number Of Timers/Counters=14, Number Of Uart Channels=6, Number Of Usb Channels=2, Octopart=https://octopart.com/stm32f446ret6-stmicroelectronics-52642920, RAM Size=128KBytes, RoHS=TRUE, Standoff Height=0.05mm, Temperature Range High=+105°C, Temperature Range Low=-40°C
Y1: "No Description Available", Mfr_Name=NDK, Copyright="Copyright (C) 2024 Ultra Librarian. All rights reserved.", Manufacturer_Part_Number=NX3225GD-8MHZ-STD-CRA-3, RefDes=RefDes, Type=DEV

## Via types
v1: diameter 50, hole 28, Top Layer to Bottom Layer, 16 vias

## Nets (pads, with @x,y where several pads share a name; then routed paths per layer and width w, separated by ;. In a path a pad name is that pad's centre, name@x,y a point inside that pad or via, vN(x,y) a via of type N, cw(c..) or ccw(c..) an arc to the next point about the centre after c; other vN are vias at no path point)
BOOT0: R9.2 U1.60 | length 108
  Top Layer w5: R9.2 2858.46,2484.33 U1.60 U1.60@2858.46,2377.28
CAN1_N: CAN.6 R8.2 | length 924.5
  Top Layer w5: CAN.6 4300.74,2860 4318.36,2842.38 4807.95,2842.38 4893.84,2928.27 4893.84,2930.61 4898.23,2935 R8.2
CAN1_P: CAN.7 SW1.1 | length 678.8
  Top Layer w5: CAN.7 4292.06,2910 4379.58,2997.52 SW1.1
"CAN STBY": CAN.8 U1.45 | length 1251.5
  Top Layer w5: U1.45 3190.42,2257.2 3492.45,2559.23 3492.45,2697.45 3736.83,2941.83 3878.09,2941.83 3909.11,2972.85 3985.32,2972.85 3998.17,2960 CAN.8
CAN_RX: CAN.4 U1.43 | length 931.5
  Top Layer w5: U1.43 3201.74,2217.83 3793.9,2810 CAN.4
CAN_TX: CAN.1 U1.44 | length 1481
  Top Layer w5: U1.44 3190.42,2237.52 3502.45,2549.55 3502.45,2572.46 3808.16,2878.17 3858.18,2878.17 3908.18,2928.17 3976.5,2928.17 3990.16,2941.83 4054.32,2941.83 4064.96,2952.47 4064.96,2967.53 4044.32,2988.17 3892.48,2988.17 3864.31,2960 CAN.1
"Debuging CLK": "Dedugging Header.3" U1.58 | length 1206
  Top Layer w5: 2832.28,3345.59 2832.28,3312.5 2813.96,3294.18 2754.52,3294.18 2736.2,3275.86 2736.2,3218.47 2756.72,3197.95 2907.85,3197.95 2928.37,3177.44 2928.37,2861.26 2897.83,2830.73 U1.58
"Debuging IO": "Dedugging Header.2" U1.57 | length 941.6
  Top Layer w5: 2832.28,3247.17 2895.28,3247.17 2938.37,3204.07 2938.37,2809.27 2917.52,2788.43 U1.57
"Fan 1 PWM": "Fan Header 1.4" U1.21 | length 1746.4
  Top Layer w5: 1477.01,1470 1540,1470 ; 1560,1475 1497.01,1475 1473.92,1498.09 1473.92,1515.63 1818.28,1860 2812.9,1860 2854.92,1902.02 2854.92,1904.94 2861.1,1911.12 U1.21@2861.1,1928.62
"Fan 1 Signal": "Fan Header 1.3" U1.20 | length 1827.8
  Top Layer w5: 1560,1376.57 1553.43,1370 1465,1370 1445,1390 1445,1500.86 1841.76,1897.62 2755.93,1897.62 2762.43,1891.12 2797.02,1891.12 2803.52,1897.62 2830.84,1897.62 2835.23,1902.02 2835.23,1904.94 2841.42,1911.12 U1.20@2841.42,1928.62
"Fan 2 PWM": "Fan Header 2.4" U1.23 | length 1307.2
  Top Layer w5: 2182.28,1459.02 2119.29,1459.02 2096.2,1482.11 2096.2,1633.99 2080,1650.19 2080,1802.07 2082.93,1805 2797.27,1805 2894.29,1902.02 2894.29,1904.94 2900.47,1911.12 U1.23@2900.47,1928.62
"Fan 2 Signal": "Fan Header 2.3" U1.22 | length 1438.1
  Top Layer w5: 2182.28,1360.59 2086.2,1360.59 2082.68,1357.07 2077.93,1357.07 2070,1365 2070,1817.07 2072.93,1820 2792.59,1820 2874.6,1902.02 2874.6,1904.94 2880.79,1911.12 U1.22@2880.79,1928.62
"Fan 3 PWM": "Fan Header 3.4" U1.25 | length 732.6
  Top Layer w5: 2787.28,1434.02 2781.3,1440 2662.93,1440 2660,1442.93 2660,1615 2939.84,1894.84 U1.25@2939.84,1928.62
"Fan 3 Signal": "Fan Header 3.3" U1.24 | length 841.5
  Top Layer w5: 2787.28,1335.59 2778.76,1327.07 2692.93,1327.07 2635,1385 2635,1620 2916.66,1901.66 2916.66,1925.12 U1.24@2920.16,1928.62
"Fan 4 PWM": "Fan Header 4.4" U1.27 | length 745.7
  Top Layer w5: U1.27@2979.21,1928.62 2979.21,1822.71 3303.92,1498 3303.92,1413.09 3327.01,1390 3390,1390
"Fan 4 Signal": "Fan Header 4.3" U1.26 | length 769.5
  Top Layer w5: U1.26@2959.53,1928.62 2959.53,1816.55 3180,1596.07 3180,1425 3300,1305 ; 3386.57,1295 3390,1291.57
GND: "12V Header.2" "Dedugging Header.4" "Fan Header 1.1" "Fan Header 2.1" "Fan Header 3.1" "Fan Header 4.1" "Temp Sensor 1.3" "Temp Sensor 2.3" "Temp Sensor 3.3" "Temp Sensor 4.3" C1.1 C2.1 C3.1 C4.1 C5.2 C6.2 C7.2 C9.1 C10.1 C11.2 C12.2 C13.2 C14.2 C15.2 C16.2 C17.2 C18.2 C19.1 C20.1 CAN.2 D1.2 D2.2 D3.2 IC1.2 IC2.2 R9.1 SW2.1 U1.12 U1.18 U1.31 U1.47 U1.63 | length 8172.2
  Top Layer w5: 1560,1179.72 2166.3,1179.72 2182.28,1163.74 2699.29,1163.74 2724.29,1138.74 2787.28,1138.74 3282.99,1138.74 3327.01,1094.72 ; C7.2 1712.82,2965 1727.82,2950 v1(1740,2950) 1782.97,2907.03 1812.7,2907.03 SW2.1@1821.02,2898.7 ; C10.1 1810,2914.72 1821.02,2903.7 SW2.1@1821.02,2898.7 ; SW2.1 SW2.1@1821.02,2898.7 ; C9.1 2180.35,2909.65 v1(2210,2880) ; v1(2410,2070) 2421.91,2070 2438.93,2087.03 2481.65,2087.03 2486.04,2082.63 2486.04,2079.9 2489.96,2075.98 2493.98,2080 C15.2 2594.02,2080 2599.02,2075 C16.2 2600.98,2075 2625.71,2099.72 U1.12 ; v1(2580,1955) 2623.88,1911.12 2788.74,1911.12 2793.13,1915.52 2793.13,1918.25 2799.41,1924.53 U1.18 ; v1(2590,3465) 2593.99,3465 2614.98,3444.02 2832.28,3444.02 ; U1.63 2799.41,2429.57 2784.96,2444.02 C13.2 2784.96,2445.98 2786,2447.03 C13.2@2786.99,2447.03 ; v1(2825,2620) 2782.48,2577.48 C14.2 2782.48,2457.48 2789.96,2450 C13.2@2786.99,2447.03 ; R9.1 2830.43,2485 2792.46,2447.03 C13.2@2786.99,2447.03 ; U1.31 3055.32,1898.56 3070.1,1883.78 3070.1,1844.67 C20.1@3050.79,1825.35 ; v1(3115,1865) 3075.35,1825.35 C20.1@3050.79,1825.35 ; U1.47 3171.46,2296.57 3177.74,2302.85 3180.47,2302.85 3221.39,2343.78 3221.39,2361.39 3267.03,2407.03 3267.03,2459.17 3262.63,2463.56 3259.9,2463.56 C18.2@3255.98,2467.48 ; C11.2 C12.2 ; C11.2 3055.31,1820.04 C20.1 C20.1@3050.79,1825.35 ; v1(3240,900) 3303.92,963.92 3303.92,1071.63 3327.01,1094.72 ; C18.2 C18.2@3255.98,2467.48 ; 3344.76,2558.92 3341.04,2558.92 C17.2 3340,2605.79 3424.21,2690 C19.1 3425.79,2690 3445.1,2670.69 3445.1,2600.1 v1(3325,2480) 3323.82,2478.82 3292.5,2478.82 3281.16,2467.48 C18.2@3255.98,2467.48 ; 3390,1094.72 3327.01,1094.72 ; v1(3725,2860) 3775,2910 CAN.2 ; C2.1 4222.68,2229.21 4231.99,2219.9 4232.41,2219.9 4242.41,2209.9 4272.24,2209.9 4303.46,2241.12 4705.22,2241.12 D2.2 4736.34,2271.34 v1(4775,2310) ; C4.1 4240.59,1291.55 4260,1272.14 v1(4260,1265) ; D1.2 4415,2584.9 4376,2545.9 4376,2480.63 4451.64,2405 C3.1 4585.98,2405 4594.04,2413.05 4594.04,2415 4634.04,2455 v1(4710,2455) 5036.12,2455 5063.52,2427.6 IC2.2 ; C5.2 4552.82,1435 4567.82,1450 v1(4580,1450) ; C1.1 4764.02,1335 4759.63,1330.61 4759.63,1329.63 4740,1310 v1(4740,1250) D3.2 ; 5638.62,1812.48 5589.41,1812.48 5562.22,1785.3 5562.22,1615.67 5615,1562.89 C6.2 5615,1212.59 5697.19,1130.4 5697.19,1103.13 5694.69,1100.63 5694.69,1097.1 5660,1062.41 IC1.2
  other v1: 1165,2815
"Net12V Header_MP1": "12V Header.MP1"
"Net12V Header_MP2": "12V Header.MP2"
NetC9_2: C9.2 U1.6 Y1.2 | length 1386.9
  Top Layer w5: Y1.2 Y1.2@2075,3093.5 ; C9.2@2207.68,2950 2212.68,2955 C9.2 2215,2975 2119.5,3070.5 2098,3070.5 Y1.2@2075,3093.5 ; U1.6 2697.58,2221.24 2677.13,2221.24 2075,2823.37 Y1.2@2075,3093.5
NetC10_2: C10.2 U1.5 Y1.1 | length 1507.8
  Top Layer w5: C10.2 1985.82,3122.32 2023,3159.5 2036.39,3159.5 2046.39,3169.5 2103.61,3169.5 2668.71,2604.39 2668.71,2243.8 2676.99,2243.8 2683.27,2237.52 U1.5
NetD1_1: D1.1 R1.1 | length 330.8
  Top Layer w5: D1.1 4418.27,2510 R1.1
NetD2_1: D2.1 R2.1 | length 716.1
  Top Layer w5: R2.1 4179.41,2238.25 4207.76,2209.9 4228.26,2209.9 4238.26,2199.9 4276.38,2199.9 4286.38,2209.9 4420.1,2209.9 4420.2,2210 D2.1
NetD3_1: D3.1 R3.1 | length 257.8
  Top Layer w5: D3.1 4991.97,1108.27 5019,1135.3 5019,1203.96 5029,1213.96 5029,1282.63 5010,1301.63 5012.2,1303.84 R3.1
"NetDedugging Header_5": "Dedugging Header.5"
"NetDedugging Header_6": "Dedugging Header.6"
"NetFan Header 1_5": "Fan Header 1.5"
"NetFan Header 1_6": "Fan Header 1.6"
"NetFan Header 2_5": "Fan Header 2.5"
"NetFan Header 2_6": "Fan Header 2.6"
"NetFan Header 3_5": "Fan Header 3.5"
"NetFan Header 3_6": "Fan Header 3.6"
"NetFan Header 4_5": "Fan Header 4.5"
"NetFan Header 4_6": "Fan Header 4.6"
NetIC2_4: IC2.4
NetR8_1: R8.1 SW1.2 | length 267.9
  Top Layer w5: SW1.2 4695.51,3076.26 4836.77,2935 R8.1
NetSW1_3: SW1.3
NetSW1_4: SW1.4
NetSW1_5: SW1.5
NetU1_2: U1.2
NetU1_3: U1.3
NetU1_4: U1.4
NetU1_8: U1.8
NetU1_14: U1.14
NetU1_15: U1.15
NetU1_17: U1.17
NetU1_28: U1.28
NetU1_29: U1.29
NetU1_33: U1.33
NetU1_34: U1.34
NetU1_35: U1.35
NetU1_36: U1.36
NetU1_37: U1.37
NetU1_38: U1.38
NetU1_39: U1.39
NetU1_40: U1.40
NetU1_41: U1.41
NetU1_42: U1.42
NetU1_46: U1.46
NetU1_49: U1.49
NetU1_50: U1.50
NetU1_51: U1.51
NetU1_52: U1.52
NetU1_53: U1.53
NetU1_54: U1.54
NetU1_55: U1.55
NetU1_56: U1.56
NetU1_59: U1.59
NetU1_61: U1.61
NetU1_62: U1.62
NRST_n: C7.1 SW2.2 U1.7 | length 1469.9
  Top Layer w5: C7.1 1593.56,2963.96 1593.56,2960.24 1705.83,2847.97 1834.96,2847.97 1871.98,2885 SW2.2 1948.98,2866.3 1957.3,2857.97 1988.67,2857.97 2648.49,2198.15 U1.7
"Temp 1": "Temp Sensor 1.2" U1.11 | length 2803.2
  Top Layer w5: 145,2290 145,2324.68 177.19,2356.87 211.26,2356.87 250,2318.13 250,2165.32 309.53,2105.79 323.15,2119.41 U1.11
"Temp 2": "Temp Sensor 2.2" U1.9 | length 1593.2
  Top Layer w5: 1430,2815 1430,2834.68 1457.19,2861.87 1622.17,2861.87 2325.26,2158.78 U1.9
"Temp 3": "Temp Sensor 3.2" U1.16 | length 3620.1
  Top Layer w5: 190,245 190,225.32 300.32,115 382.07,115 385,117.93 385,474.68 1917.68,2007.36 2660.33,2007.36 2670.11,1997.58 2703.62,1997.58 2703.62,2018.35 U1.16 ; 190,260 190,279.68
"Temp 4": "Temp Sensor 4.2" U1.10 | length 1372.1
  Top Layer w5: 1405,2295 1405,2275.32 1541.22,2139.09 U1.10
VCAP_1: C20.2 U1.30 | length 88.2
  Top Layer w5: U1.30 3035.63,1904.1 3050,1889.73 C20.2
VCC3V3: "Dedugging Header.1" "Temp Sensor 1.1" "Temp Sensor 2.1" "Temp Sensor 3.1" "Temp Sensor 4.1" C4.2 C5.1 C11.1 C12.1 C13.1 C14.1 C15.1 C16.1 C17.1 C18.1 C19.2 CAN.5 IC2.5 R1.2 U1.1 U1.13 U1.19 U1.32 U1.48 U1.64 | length 14647
  Top Layer w5: 200,2310 200,2201.17 240,2161.17 ; 240,245 240,2161.17 ; 1455,2295 1455,2314.68 ; 1480,2815 1480,2339.68 1455,2314.68 ; U1.19 U1.19@2819.09,1959.96 ; 2832.28,3148.74 2790.61,3148.74 2767.52,3125.65 C14.1 2767.52,2479.02 2770,2476.54 C13.1 2770,2444.02 2764.84,2438.86 2779.72,2423.98 U1.64 2779.72,2377.28 U1.1@2718.7,2316.26 ; C18.1 C18.1@3254.02,2452.52 ; C12.1 3751,1834.96 4259.63,1326.34 4259.63,1324.39 4264.02,1320 C4.2 4360.98,1320 4475,1434.02 C5.1 ; C12.1 C11.1 3180,1860 3118.88,1921.12 3078.41,1921.12 3075,1924.53 U1.32 ; C19.2 3424.21,2655.35 3414.9,2646.04 3414.9,2614.92 3348.9,2548.92 3344.9,2548.92 3340.98,2545 C17.1 C17.1@3339.02,2545 ; IC2.5 5158.05,2465 5113.05,2510 R1.2 4768.23,2510 4760.57,2517.66 4760.57,2520 4470.57,2810 CAN.5 4008.22,2810 4000.67,2817.55 4000.67,2831.8 3980,2852.47 3980,2917.53 3994.3,2931.83 4058.46,2931.83 4090,2963.37 4090,2970 4061.83,2998.17 3698.16,2998.17 3327.97,2627.99 3327.97,2553.31 3332.37,2548.92 3335.1,2548.92 C17.1@3339.02,2545 ; 240,2161.17 363.67,2037.5 2453.49,2037.5 2481.02,2065.04 C15.1 2568.02,2065.04 2573.02,2060.04 C16.1 2632.65,2060.04 2652.65,2080.04 U1.13 U1.13@2718.7,2080.04 ; 1455,2314.68 1455,2536.26 1351.91,2639.35 1351.91,2845.04 1686.37,3179.5 2107.75,3179.5 2700.98,2586.26 U1.1 U1.1@2718.7,2316.26 ; U1.13@2718.7,2080.04 2730.04,2080.04 2765,2115 2765,2272.69 2727.71,2309.98 2724.98,2309.98 U1.1@2718.7,2316.26 ; U1.13@2718.7,2080.04 2724.98,2073.76 2727.71,2073.76 2819.09,1982.38 U1.19@2819.09,1959.96 ; U1.19@2819.09,1959.96 2825.37,1966.24 2825.37,1968.97 2829.77,1973.37 3064.33,1973.37 3071.59,1966.1 3071.59,1945.65 U1.32 ; U1.32 3075,2257.97 3129.89,2312.85 3150.33,2312.85 U1.48 3153.74,2352.24 C18.1@3254.02,2452.52 ; C18.1@3254.02,2452.52 3250.1,2456.44 3247.37,2456.44 3242.97,2460.83 3242.97,2474.13 3313.84,2545 C17.1@3339.02,2545
VCC5V: C2.2 C3.2 C6.1 CAN.3 IC1.3 IC2.1 IC2.3 R2.2 | length 3387.5
  Top Layer w5: CAN.3 3864.31,2860 4198.84,2525.47 4198.84,2464.39 4203.23,2460 R2.2 ; C2.2 4257.32,2230.79 4205,2283.11 R2.2 ; IC2.1 5106.48,2465 5126.1,2445.38 5126.1,2409.82 5106.48,2390.2 IC2.3 ; IC1.3 5600.04,1174.96 C6.1 5600.04,1420.98 5085,1936.02 IC2.3 ; R2.2 4368.88,2460 4438.27,2390.61 4595.98,2390.61 4604.04,2398.66 4604.04,2400.61 4608.43,2405 C3.2 5048.71,2405 5063.52,2390.2 IC2.3
VCC12V: "12V Header.1" "Fan Header 1.2" "Fan Header 2.2" "Fan Header 3.2" "Fan Header 4.2" C1.2 IC1.1 R3.2 | length 5382.2
  Top Layer w5: 1560,1278.15 1575.98,1262.17 ; 2699.29,1262.17 2724.29,1237.17 2787.28,1237.17 ; 3282.99,1237.17 3327.01,1193.15 3390,1193.15 ; 4753.78,1374.39 4758.17,1370 4758.17,1368.05 4780.37,1345.85 4780.37,1343.05 4788.43,1335 C1.2 ; R3.2@5033.82,1343.98 R3.2
  Top Layer w10: 1575.98,1262.17 2182.28,1262.17 2699.29,1262.17 ; 2787.28,1237.17 3282.99,1237.17 ; 3390,1193.15 4402.86,1193.15 4584.1,1374.39 4753.78,1374.39 5021.77,1374.39 5021.77,1372.05 5033.82,1360 5065,1360 ; R3.2 5039.57,1340 5048.84,1349.27 5054.27,1349.27 5065,1360 ; 5638.62,1733.74 5625,1720.12 5625,1655 5715,1565 5715,970 IC1.1 5215,1360 5065,1360

## Polygon pours and split planes (outlines as drawn)
GND on Bottom Layer "GND_L02_P000" (solid, pour order 0): -100,4080 -115,4065 -115,-150 6520,-150 6590,-80 6435,75 6435,4110

## Silkscreen, mask and mechanical layers (free items; w line width, h text height)
Top Overlay:
  drawing of 13 lines, arcs and shapes, not listed

## Text inside footprints (layer, text, board x,y; h text height)
"Temp Sensor 1": Top Overlay "3" at 131.61,2405.32 h59.05 r90; Top Overlay "1" at 227.91,2405.32 h59.05 r90
"Temp Sensor 2": Top Overlay "3" at 1411.61,2910.32 h59.05 r90; Top Overlay "1" at 1507.91,2910.32 h59.05 r90
"Temp Sensor 3": Top Overlay "3" at 171.61,340.32 h59.05 r90; Top Overlay "1" at 267.91,340.32 h59.05 r90
"Temp Sensor 4": Top Overlay "1" at 1482.91,2390.32 h59.05 r90; Top Overlay "3" at 1386.61,2390.32 h59.05 r90